# Altium PCB FM5006C.PcbDoc
Units mil, origin at the board's own origin, x right, y up, seen from the top; angles counter-clockwise.
Board outline 2170.03 x 1610.03 mil, 2 copper layers (Top Layer, Bottom Layer); 25 components, 15 nets, 79 pads, 78 vias.
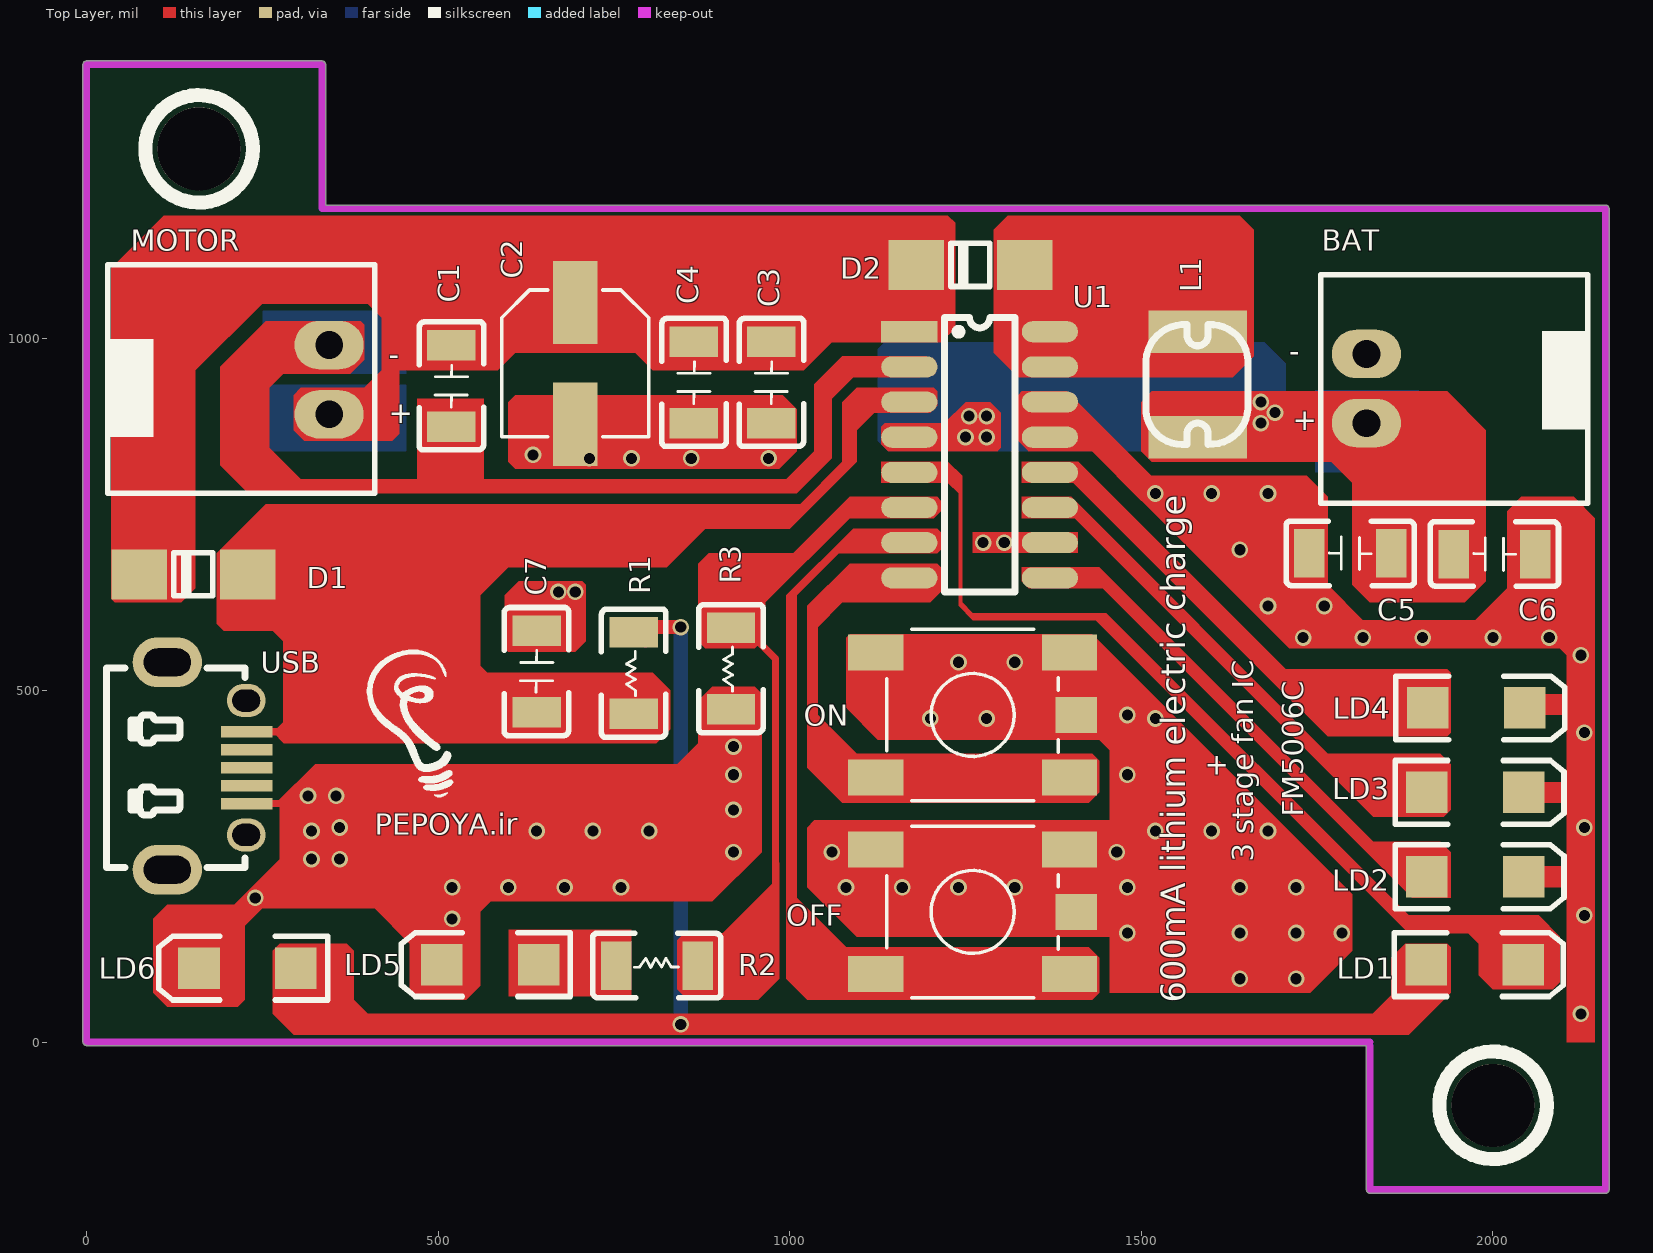
[diagram p0: Top Layer view]
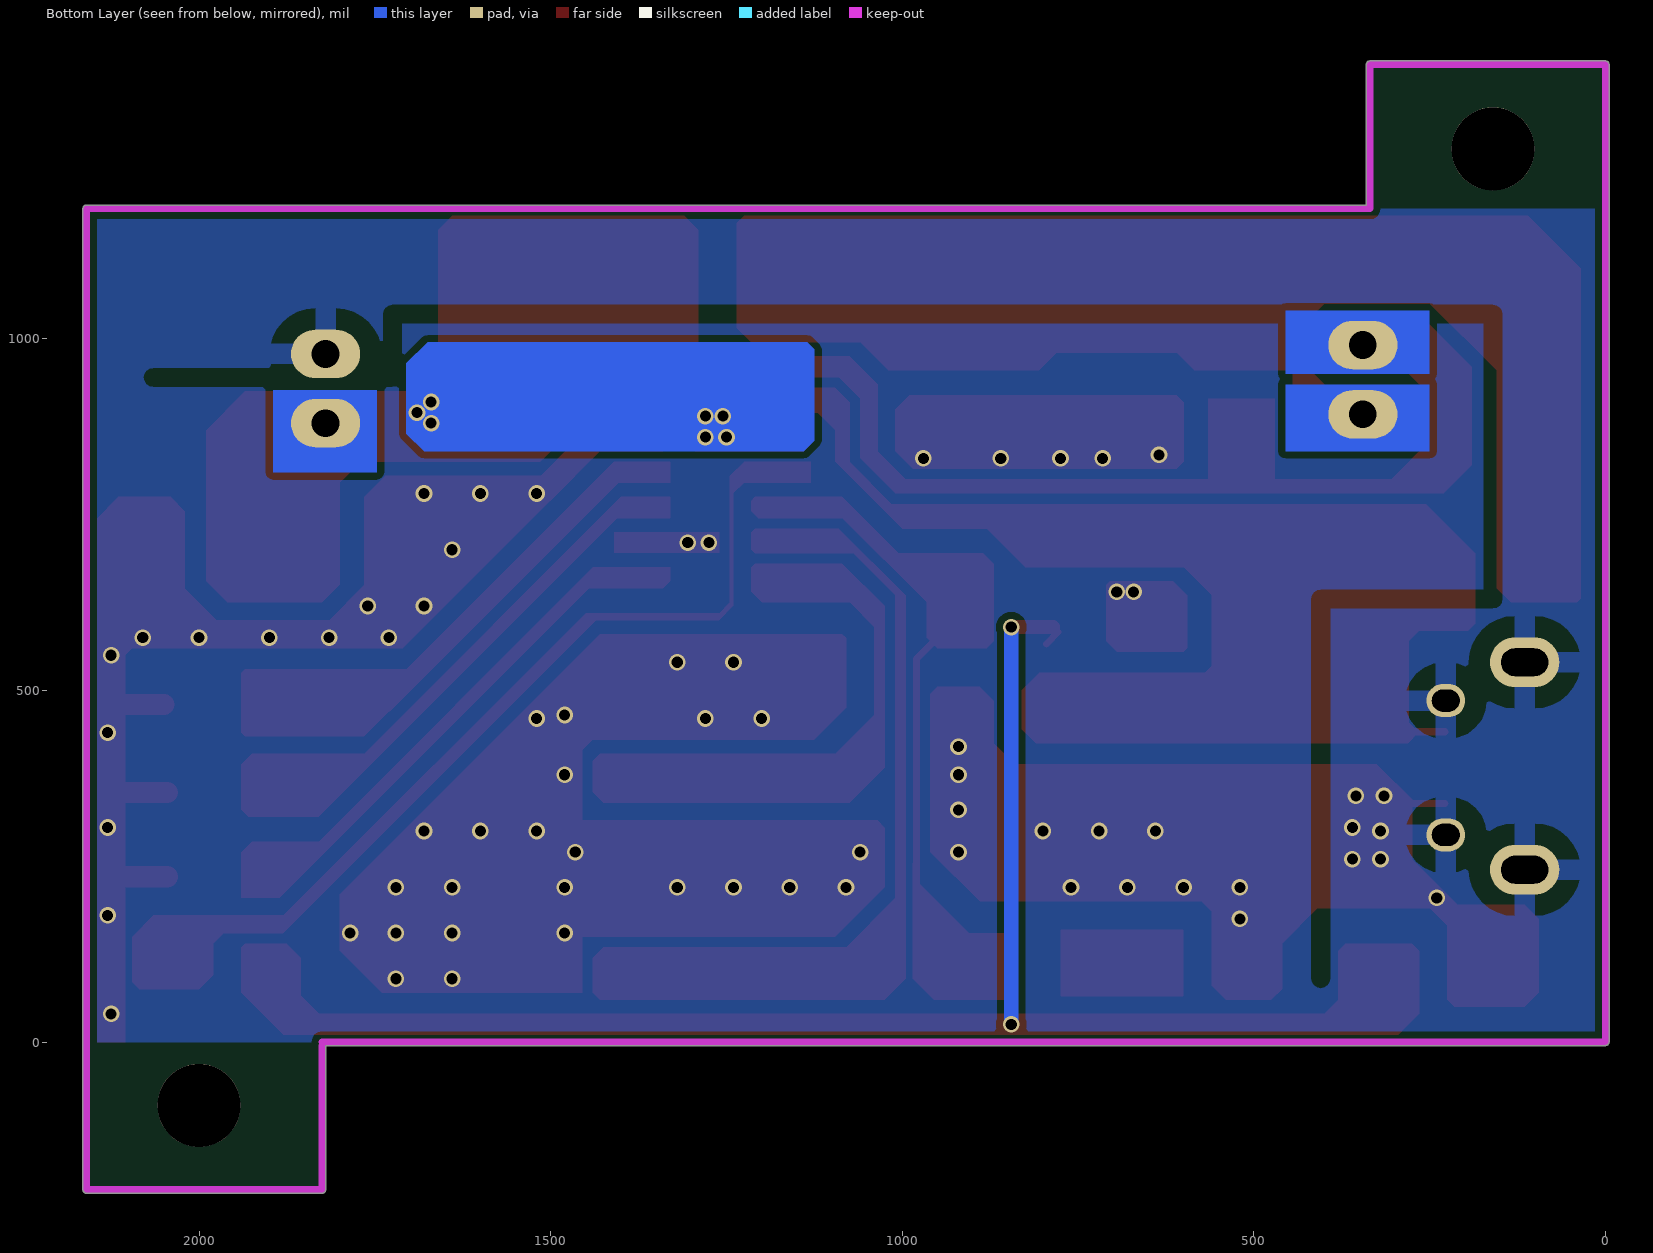
[diagram p1: Bottom Layer view, seen from below]
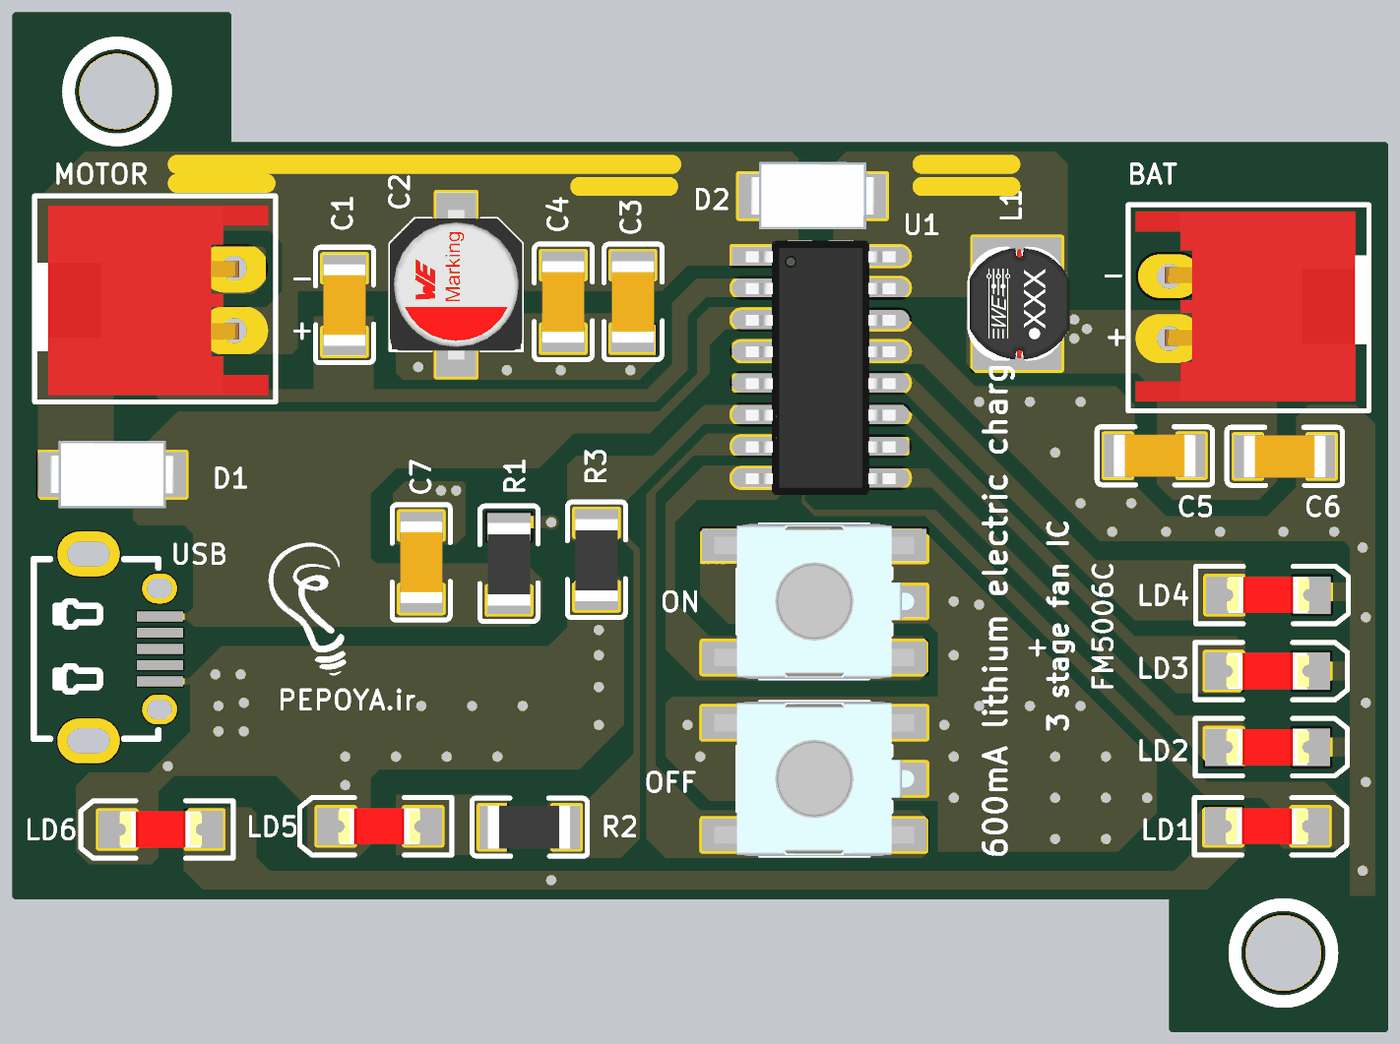
[diagram p2: 3D render of the assembled board from above, using the file's embedded part models]

## Layer stack, top to bottom
Top Solder: solder mask 0.4, Solder Resist, Dk 3.5
Top Layer: signal copper 1.4
Dielectric 1: dielectric 12.6, FR-4, Dk 4.8
Bottom Layer: signal copper 1.4
Bottom Solder: solder mask 0.4, Solder Resist, Dk 3.5

## Board outline
-5.01,0 -5.01,1390 cw(c0,1390) 0,1395.01 335,1395.01 cw(c335,1390) 340.01,1390 340.01,1190.01 2160,1190.01 cw(c2160,1185) 2165.02,1185 2165.01,0.03 2165.02,0 2165.02,-210 cw(c2160,-210) 2160,-215.01 1825,-215.02 cw(c1825,-210) 1819.98,-210 1819.98,-5.01 0,-5.01 cw(c0,0)

## Design rules (kind name [scope] priority, off if disabled: settings)
Clearance [All] p1: gap=10 ignorepadtopadclearanceinfootprint=FALSE
PlaneConnect [All] p1: pad.planeconnectstyle=Relief pad.reliefexpansion=20 pad.reliefentries=4 pad.reliefconductorwidth=20 pad.reliefairgap=20 via.planeconnectstyle=Direct via.reliefexpansion=20 via.reliefentries=4 via.reliefconductorwidth=10 via.reliefairgap=10
PolygonConnect [All] p1: thpad.connectstyle=Relief thpad.reliefconductorwidth=30 thpad.reliefentries=4 thpad.polygonreliefangle="90 Angle" thpad.airgapwidth=30 smdpad.connectstyle=Relief smdpad.reliefconductorwidth=10 smdpad.reliefentries=4 smdpad.polygonreliefangle="90 Angle" smdpad.airgapwidth=10 via.connectstyle=Direct via.reliefconductorwidth=10 via.reliefentries=4 via.polygonreliefangle="90 Angle" via.airgapwidth=10
RoutingVias [All] p1: holewidth=15.75 width=23.62 viastyle="Through Hole" minholewidth=15.75 minwidth=23.62 maxholewidth=15.75 maxwidth=23.62
SolderMaskExpansion [All] p1: expansion=4 istentingtop=FALSE
Width [All] p1: maxlimit=10 minlimit=10 preferedwidth=10
29 further rules are at their usual default settings.

## Components (designator, comment, footprint, x,y, rotation, side; value= is the part's Value field where it differs from the comment)
BAT "XH-2P" XHB-2AW 1815,926 r0 top
C1 "22UF" "Cap1206 - duplicate" 515,930 r270 top value=100nF
C2 "47UF/16V" "WCAP-AS5H 5x5.5x1.4" 695,965 r270 top value="3.3uF 400V"
C3 "22UF" "Cap1206 - duplicate" 970,935 r270 top value=100nF
C4 "22UF" "Cap1206 - duplicate" 860,935 r270 top value=100nF
C5 "1UF" "Cap1206 - duplicate" 1794.13,698.81 r180 top value=100nF
C6 "100NF" "Cap1206 - duplicate" 2005,690 r0 top value=100nF
C7 "1UF" "Cap1206 - duplicate" 643.81,529.72 r90 top value=100nF
D1 "SS14" "Diode 1N4007 SMD" 229.33,665 r180 top (schematic designator D)
D2 "SS14" "Diode 1N4007 SMD" 1334.33,1105 r180 top
L1 "3.3uH" "Inductor 4532" 1580,995 r90 top value="1mH 0.3A"
LD1 "LED_red" "LED 1206" 1973.9,110 r0 top value=RED
LD2 "LED1206" "LED 1206" 1975,235 r0 top
LD3 "LED1206" "LED 1206" 1975,355 r0 top
LD4 "LED1206" "LED 1206" 1976.1,475 r0 top
LD5 "LED1206" "LED 1206" 573.9,110 r180 top
LD6 "LED_green" "LED 1206" 228.9,105 r180 top value=GREEN
MOTOR "XH-2P" XHB-2AW 350,945 r180 top
OFF "SW-PUSH-CMS_BLUE" 431471031826 1260,185 r180 top value=SW_BLUE
ON "SW-PUSH-CMS_BLUE" 431471031826 1260,465 r180 top value=SW_BLUE
R1 "2K" RES1206 781.86,523.62 r90 top value=NS
R2 "30R" RES1206 810,105 r0 top value=NS
R3 "2K" RES1206 920,530 r90 top value=NS
U1 "FM5006C" SOP-16 1170,1010 r0 top
USB "Micro Input" "USB MICRO" 35,250 r0 top

## Footprints (in the part's own frame and the unit in brackets; to place one, negate y for a bottom-side part, rotate by r counter-clockwise, add the part's x,y. Pads: shape width x height; smd on the part's side, far side on the other; paste and mask are expansions set on the pad)
431471031826 [mm] "6*6mm vertical type, SMD, height 3.1mm, white actuator, 260gf, Grounded Terminal, T&R"
  rect 2x1.3 smd: 1(3.5,-2.25) 2(-3.5,-2.25) 3(3.5,2.25) 4(-3.5,2.25)
  rect 1.5x1.3 smd: 5(-3.75,0)
  silkscreen extent -3.1,-3.1 3.1,3.1, body extent -4,-3.1 4,3.1, height 3.09
"Cap1206 - duplicate" [mm]
  rect 1.1x1.75 smd: 1(-1.546,0.097) 2(1.404,0.097)
  silkscreen extent -2.39,-1.06 2.24,1.27, body extent -1.72,-0.75 1.58,0.95, height 0.94
"Diode 1N4007 SMD" [mm] "DO-214AC 1N4001-4007"
  rect 2x1.8 smd: 1(0,0) 2(3.92,0)
  silkscreen extent 1.27,-0.81 2.67,0.83, body extent -0.54,-1.36 4.46,1.34, height 2.16
"Inductor 4532" [mil]
  rect 60x140 smd: 1(15,0) 2(-135,0)
  silkscreen extent -145,-72 25,74, body extent -148,-82 28,75
"LED 1206" [mm]
  rect 1.5x1.5 smd: 1(-1.75,0) 2(1.75,0)
  silkscreen extent -2.9,-1.15 3.2,1.15, body extent -1.65,-0.72 1.65,0.73, height 1.36
RES1206 [mm] "Chip Resistor, 2-Leads, Body 3/20x1/60mm, IPC Medium Density DESIGNER:ABBAS BASEREH"
  rect 1.1x1.75 smd: 1(-1.446,0.09) 2(1.504,0.09)
  silkscreen extent -2.29,-1.07 2.34,1.26, body extent -1.65,-0.76 1.65,0.94, height 0.94
SOP-16 [mil]
  rect 80x30 smd: 1(0,0)
  oval 80x30 smd: 2(0,-50) 3(0,-100) 4(0,-150) 5(0,-200) 6(0,-250) 7(0,-300) 8(0,-350) 9(200,-350) 10(200,-300) 11(200,-250) 12(200,-200) 13(200,-150) 14(200,-100) 15(200,-50) 16(200,0)
  silkscreen extent 50,-370 150,20, body extent -18,-377 218,25, height 67
"USB MICRO" [mm]
  rect 1.854x0.4 smd paste+0 mask+0.051: 1(4.902,4.856) 2(4.902,4.206) 3(4.902,3.556) 4(4.902,2.906) 5(4.902,2.256)
  oval 2.5x1.8 hole 1 slot 1.7 at 0 deg paste-2539.97 mask+0.051: 6(2.032,-0.127) 6(2.032,7.366)
  oval 1.4x1.2 hole 0.8 slot 1 at 0 deg paste-2539.97 mask+0.051: 6(4.879,1.131) 6(4.879,5.981)
  silkscreen extent -0.17,-0.04 4.83,7.16, body extent -0.77,-0.77 5.13,7.88, height 2.8
"WCAP-AS5H 5x5.5x1.4" [mm] "Polarized capacitors, Aluminum Electrolytic Capacitors, 2-Leads, Body 5x5.5x1.4"
  rect 3x1.6 smd: 1(-2.2,0) 2(2.2,0)
  silkscreen extent -2.65,-2.65 2.65,2.65, body extent -3,-2.65 3,2.65
XHB-2AW [mm]
  oval 2.5x1.75 hole 1: 1(0.127,-1.168) 2(0.127,1.332)
  silkscreen extent -1.52,-4.06 8.13,4.19, body extent -1.23,-3.68 7.58,3.92, height 6.55

## Part data
BAT MOTOR: library part JST-2, "=Description"
C1 C3 C4 C5 C6 C7: library part C_1206, Manufacturer Part Number="1206 100nF", Package=1206, Automotive=Y, DrownBy=Xavi.Rocher, Revised=Oriol.Cos
C2: library part EKRG250ETD101MF09D, "3.3uF 400V", Manufacturer=Wurth, Manufacturer Part Number=860021373005, Package=CER6, Supplier Part Number 1=710-860021373005, Datasheet=https://www.mouser.es/datasheet/2/445/860021373005-1075178.pdf, DrownBy=Xavi.Rocher, Revised=Oriol.Cos, Supplier 1=Mouser
D1 D2: library part DIODE_1N4148, "High Conductance Fast Diode", Code_JEDEC=DO-204-AH, Company="SJ Libraries", ComponentLink1Description=Datasheet, ComponentLink1URL=http://www.fairchildsemi.com/, ComponentLink2Description=Reference, ComponentLink2URL=http://www.fairchildsemi.com/ds/1N%2F1N4148.pdf, Designer="Eng. Saeid Jorablo", HelpURL=http://s3.picofile.com/file/7443264187/Coming_Soon_logo.gif, LatestRevisionDate=17-Jul-2002, LatestRevisionNote="Re-released for DXP Platform.", Mounting Technology="Surface Mount\Through-Hole", PackageDescription="Diode, Axial; Body 3.8 x 1.9 mm (LxDia. max), Lead Dia. 0.53 mm (max)", PackageReference=DO-35, Published=8-Jun-2000, Publisher="SJ Unlimited", Status=Unreleased
L1: library part DR0608-105L, "1mH 0.43A DR0608", Manufacturer=BOURNS, Manufacturer Part Number=4532, Package=DR0608, Supplier Part Number 1=1929764, Datasheet=http://www.farnell.com/datasheets/2360349.pdf?_ga=2.137143415.674541929.1556003454-804436753.1549448632, DrownBy=Xavi.Rocher, Revised=Oriol.Cos, Supplier 1=Farnell
LD1: library part MCD-02899, "LED, Red, VF : Min=1.75V , Max=2.35V, 25mA, 0603", Manufacturer=EVERLIGHT, Manufacturer_Part_Number=19-213/R6C-AP1Q2B/5T, Package=0603, Component_Country_Of_Origin=China, ComponentLink1URL=http://tunmcdsvn.tun.st.com/Component_Documentation_Library/Trunk/Display/EVERLIGHT_19-213-R6C-AP1Q2B-5T, Full_Alternate_Internal_Part_Number=MCD-00049, ID=5015, Internal_Part_Number=MCD-02899, Order_Code_Digikey=1080-19-213/R6C-AP1Q2B/5TTR-ND, Order_Code_Farnell=N/A, Order_Code_RS=N/A, Part_Preference=Recommended, Part_Type=Display, ShowFields=YES, Status=Checked
LD2 LD3 LD4 LD5: library part "LED 5MM", "Light Emitting Diode", Data=16-12-2016, Designer="Abbas Basereh"
LD6: library part MCD-02900, "LED, Green, 2V, 25mA, 0603, SMD", Manufacturer=EVERLIGHT, Manufacturer_Part_Number=19-213SYGC/S530-E2/5T, Package=0603, Component_Country_Of_Origin=China, ComponentLink1URL=http://tunmcdsvn.tun.st.com/Component_Documentation_Library/Trunk/Display/EVERLIGHT_19-213SYGC-S530-E2-5T, Full_Alternate_Internal_Part_Number=MCD-00320, ID=5016, Internal_Part_Number=MCD-02900, Order_Code_Digikey=1080-19-213SYGC/S530-E2/5TTR-ND, Order_Code_Farnell=N/A, Order_Code_RS=N/A, Part_Preference=Recommended, Part_Type=Display, Partial_Alternate_Internal_Part_Number=MCD-00050, ShowFields=YES, Status=Checked
OFF ON: library part MCD-00002, "Non-Open Push-Button 0.1A 24V BLUE", Manufacturer=WEALTHMETAL, ComponentLink1Description=Datasheet, ComponentLink1URL=http://tunmcdsvn.tun.st.com/Component_Datasheet_Library/Trunk/Misc/Wealthmetal_Tact-Switch_TD0341, Initial_Board_Reference=MB1274, Internal_Part_Number=MCD-00002, Order_Code_Farnell=535-930, Part_Type=Misc, Provided_By=Subcon, Status=Released
R1 R2 R3: library part R_1206, Package=1206, Automotive=Y, DrownBy=Xavi.Rocher, Revised=Oriol.Cos
U1: "SO-16"
USB: JLCPCB Part Class="Extended Part", Manufacturer="XKB Enterprise", Manufacturer Part=U254-051T-4BH23-S2B, Contributor=LCSC, spicePre=U, spiceSymbolName=U254-051T-4BH23-S2B, Supplier=LCSC, Supplier Part=C319164

## Free pads (board coordinates)
  round 118.11 hole 118.11: 8(160,1270) 8(2000,-90)

## Via types
v1: diameter 23.62, hole 15.75, Top Layer to Bottom Layer, tented both sides, 76 vias
v2: diameter 23.62, hole 15.75, Top Layer to Bottom Layer, 2 vias

## Nets (pads, with @x,y where several pads share a name; then routed paths per layer and width w, separated by ;. In a path a pad name is that pad's centre, name@x,y a point inside that pad or via, vN(x,y) a via of type N, cw(c..) or ccw(c..) an arc to the next point about the centre after c; other vN are vias at no path point)
5.0V: C7.1 D1.1 R1.1 U1.3 USB.1 | length 1571.3
  Top Layer w10: USB.1 301.18,441.18 310,450 310,655 300,665 D1.1@233.27,665 ; D1.1 D1.1@233.27,665 ; 530,470 531.14,468.86 C7.1 642.19,466.67 R1.1 ; 995,740 308.27,740 D1.1@233.27,665 ; 1085,830 1085,890 1105,910 U1.3
BAT: BAT.1 C5.1 C6.1 L1.2 U1.4 | length 934.4
  Top Layer w10: U1.4 v1(1250,860) ; L1.2 1600,880 v1(1670,880) ; v1(1670,910) 1675,905 v1@1675,903.9 ; C5.1 1855,825 1865.86,835.86 1874.14,835.86 1944.13,765.87 C6.1
  Bottom Layer w10: v1(1250,860) 1620,860 ; v1(1670,880) 1670,900 v1@1675,905 ; v1(1670,910) v1@1675,905 ; v1(1690,895) 1686.31,895 1676.31,905 v1@1675,905
  other v1: 1280,860 1255,890 1280,890
GND: BAT.2 C2.2 C3.2 C4.2 C5.2 C6.2 C7.2 LD2.2 LD3.2 LD4.2 LD5.2 LD6.2 OFF.1 OFF.2 ON.1 ON.2 R3.1 U1.10 U1.13 U1.14 USB.5 USB.6 | length 2468.1
  Top Layer w10: LD6.2@135.47,129.53 LD6.2 ; USB.5 898.82,338.82 920,360 v1(920,380) v1(920,420) 920,466.59 915,471.59 R3.1 ; LD5.2 505,156.31 520,171.31 v1(520,175) ; C7.2 652.8,585 697.8,630 v1@700,630 ; v1(860,830) 860,875.91 C4.2 C3.2 C3.2@975,878.54 ; v1(970,830) 970,833.69 v1@975,838.69 ; v1(1060,270) 1118.62,270 OFF.1 ; ON.1@1118.62,550 ON.1 1320,553.58 ON.2 ; OFF.1@1129.44,265 OFF.2@1405.03,265 ; v2(1275,710) v2(1305,710) U1.10 ; U1.13 1430,860 1500,790 1625,790 ; OFF.2 1401.38,270 v1(1465,270) ; 2040,585 2045,580 ; LD2.2 LD2.2@2045,236.1 ; LD4.2 LD4.2@2050,480
  Top Layer w30: LD2.2@2045,235 2115,235 ; LD3.2@2045,355 2115,355 ; LD4.2@2050,480 2120,480
  other v1: 2125,40 1640,90 1720,90 1480,155 1640,155 1720,155 1785,155 2130,180 240,205 520,220 600,220 680,220 760,220 1080,220 1160,220 1240,220 1320,220 1480,220 1640,220 1720,220 320,260 360,260 920,270 320,300 640,300 720,300 800,300 1520,300 1600,300 1680,300 360,305 2130,305 920,330 315,350 355,350 1480,380 2130,440 1200,460 1280,460 1520,460 1480,465 1240,540 1320,540 2125,550 1730,575 1815,575 1900,575 2000,575 2080,575 1680,620 1760,620 671.1,640 695,640 1640,700 1520,780 1600,780 1680,780 715,830 775,830 635,835
NetC1_1: C1.1 C2.1 C3.1 C4.1 D1.2 D2.2 MOTOR.2 U1.1 | length 1818.5
  Top Layer w10: D1.2 75,1055 120,1100 510,1100 525,1085 525,1065 ; 445,980 455.87,990.87 C1.1 525,997.06 525,1065 ; D2.2 1180,1020 U1.1 877.94,1010 C4.1 851.02,995.87 811.88,1035 711.61,1035 C2.1 681.61,1065 525,1065
NetC1_2: C1.2 MOTOR.1 U1.2 | length 1276.9
  Top Layer w10: MOTOR.1 266,991 220,945 220,815 240,795 515,795 ; C1.2 518.81,798.81 515,795 ; 1015,795 518.81,795 515,795 ; 1060,940 1080,960 U1.2
NetD2_1: D2.1 L1.1 U1.15 U1.16 | length 317.1
  Top Layer w10: D2.1 1338.27,1105 1370,1073.27 U1.16 ; U1.15 U1.16 ; L1.1@1525,1010 U1.16
NetLD1_1: LD1.1 LD6.1 R1.2 | length 2364.7
  Top Layer w10: LD6.1 297.8,52.2 325,25 1820,25 LD1.1 ; R1.2@785.51,590 R1.2 R1.2@794.98,566.16
  Top Layer w20: R1.2@785.51,590 v1(845,590)
  Bottom Layer w20: v1(845,25) v1(845,590)
NetLD1_2: LD1.2 U1.5 | length 223.2
  Top Layer w10: 1875,170 2035,170 2042.8,162.2 LD1.2
NetLD2_1: LD2.1 U1.9 | length 128.9
  Top Layer w10: U1.9 1445,660 ; 1857.43,247.57 1893.53,247.57 LD2.1
NetLD3_1: LD3.1 U1.11 | length 136.4
  Top Layer w10: U1.11 1373.71,756.29 U1.11@1403.71,756.29 ; 1805,355 LD3.1
NetLD4_1: LD4.1 U1.12 | length 676
  Top Layer w10: U1.12 1395,810 1730,475 LD4.1
NetLD5_1: LD5.1 R2.1 | length 5
  Top Layer w10: R2.1@749.52,105 R2.1
NetOFF_3: OFF.3 OFF.4 U1.7 | length 429.4
  Top Layer w10: 1000,115 1020,95 OFF.4@1421.1,95
NetON_3: ON.3 ON.4 U1.8 | length 742.4
  Top Layer w10: U1.8 1080,660 1030,610 1030,410 1063.58,376.42 ON.3 ON.4
NetR2_2: R2.2 R3.2 U1.6 | length 895
  Top Layer w10: R2.2@869.2,113.54 948.54,113.54 980,145 980,545 950.12,574.88 950.12,630.12 1080,760 U1.6
pads on no net: OFF.5 ON.5 USB.2 USB.3 USB.4

## Polygon pours and split planes (outlines as drawn)
GND on Bottom Layer "GND_L02_P000" (solid, remove dead copper, pour order 0): 2170,1180 2170,0 0,0 5,5 5,1185 2165,1185

## Keep-outs
Keep-Out Layer:
  lines w10: 0,1180 0,1390 335,1390 335,1185 2160,1185 2160,0 2160,-210 1825,-210 1825,-5 ; 0,1185 0,1110 0,0 1825,0

## Other copper
Top Layer:
  rectangle net GND: 1260,695 1410,725
  rectangle net NetLD5_1: 600,65 775,160
  rectangle net NetC1_2: 470,790 565,915
  region net NetLD1_1: 1940,70 1880,10 295,10 265,40 265,130 275,140 370,140 380,130 380,60 400,40 1835,40 1855,60 1855,120 1875,140 1935,140 1940,135
  region net NetR2_2: 840,75 855,60 955,60 985,90 985,255 980,260 980,230 905,155 850,155 840,145
  region net GND: 2095,560 2105,550 2105,0 2145,0 2145,745 2115,775
  region net GND: 710,650 710,570 695,555 600,555 595,560 595,635 615,655 705,655
  region net GND: 1430,580 1800,210 1800,130 1740,70 1455,70 1455,415 1430,440
  region net 5.0V: 560,635 560,535 570,525 805,525 830,500 830,445 810,425 515,425
  region net GND: 270,340 325,395 840,395 870,425 870,485 890,505 950,505 960,495 960,270 890,200 575,200 560,185 560,80 540,60 475,60 460,75 460,140 410,190 250,190 225,165 225,60 215,50 115,50 95,70 95,175 115,195 210,195 275,260 275,335
  region net 5.0V: 325,425 515,425 560,470 560,635 600,675 825,675 885,735 380,735 365,750 320,705 320,700
  region net GND: 1025,220 1095,150 1455,150 1485,180 1485,300 1470,315 1035,315 1025,305
  region net GND: 1080,475 1125,430 1440,430 1460,450 1460,550 1430,580 1085,580 1080,575
  region net NetON_3: 1215,640 1200,625 1075,625 1040,590 1040,465 1095,410 1430,410 1440,400 1440,355 1425,340 1075,340 1025,390 1025,620 1085,680 1210,680 1215,675
  region net NetOFF_3: 1215,700 1210,695 1070,695 1010,635 1010,205 1080,135 1425,135 1440,120 1440,70 1430,60 1025,60 995,90 995,635 1090,730 1210,730 1215,725
  region net NetR2_2: 1215,770 1215,755 1205,745 1085,745 965,625 965,575 950,560 880,560 870,570 870,680 885,695 1005,695 1085,775 1210,775
  region net NetLD4_1: 1940,440 1935,435 1765,435 1405,795 1330,795 1330,825 1410,825 1705,530 1935,530 1940,525
  region net NetLD1_2: 1130,825 1225,825 1245,805 1245,625 1260,610 1450,610 1880,180 2065,180 2095,150 2095,85 2085,75 2000,75 1980,95 1980,140 1965,155 1880,155 1435,600 1260,600 1240,620 1240,780 1225,795 1130,795
  region net NetLD2_1: 1330,675 1440,675 1830,285 1925,285 1940,270 1940,205 1885,205 1445,645 1340,645 1330,655
  region net NetLD3_1: 1330,775 1400,775 1765,410 1925,410 1940,395 1940,330 1930,320 1830,320 1405,745 1330,745
  region net GND: 1765,650 1815,600 1975,600 2020,645 2020,755 2040,775 2115,775 2125,765 2125,590 2095,560 1710,560 1490,780 1490,805 1735,805 1765,775
  region net BAT: 1875,925 1935,925 1990,870 1990,655 1960,625 1825,625 1800,650 1800,795 1760,835
  region net BAT: 1695,925 1875,925 1895,905 1895,855 1865,825 1700,825
  region net BAT: 1500,840 1515,825 1700,825 1710,835 1710,920 1705,925 1515,925 1500,910
  region net GND: 1325,855 1340,840 1430,840 1500,770 1690,770 1690,805 1513.79,805 1393.79,925 1330,925 1325,920
  region net BAT: 1130,850 1140,840 1295,840 1300,845 1300,895 1285,910 1250,910 1220,880 1135,880 1130,875
  region net NetD2_1: 1290,980 1325,945 1630,945 1660,975 1660,1155 1640,1175 1310,1175 1290,1155
  region net 5.0V: 1210,905 1200,895 1120,895 1095,870 1095,825 1000,730 385,730 355,700 355,455 325,425 280.77,425 265.39,440.39 280,455 280,570 265,585 195,585 185,595 185,695 255,765 1015,765 1075,825 1075,910 1095,930 1205,930 1210,925
  region net GND: 600,825 610,815 985,815 1010,840 1010,900 990,920 610,920 600,910
  region net NetC1_2: 395,970 375,950 280,950 260,930 260,845 305,800 995,800 1035,840 1035,935 1075,975 1195,975 1195,955 1185,945 1090,945 1060,915 1060,830 1010,780 230,780 190,820 190,960 255,1025 390,1025 395,1020
  region net NetC1_1: 420,955 420,1030 400,1050 250,1050 155,955 155,645 135,625 40,625 35,630 35,1100 110,1175 510,1175
  region net NetC1_1: 1235,1165 1235,1015 1215,995 1060,995 1020,955 805,955 780,980 610,980 585,955 445,955 445,865 435,855 310,855 295,870 295,920 305,930 395,930 420,955 420,1085 510,1175 1225,1175
Bottom Layer:
  rectangle net NetC1_1: 250,840 455,935
  rectangle net NetC1_2: 250,950 455,1040
  rectangle net BAT: 1747.08,810 1895,927.2
  region net BAT: 1125,855 1140,840 1680,840 1705,865 1705,965 1675,995 1135,995 1125,985

## Silkscreen, mask and mechanical layers (free items; w line width, h text height)
Top Overlay:
  drawing of 7 lines, arcs and shapes, not listed
  text "-" at 1710,967.15 h30
  text "-" at 430,962.15 h30
  text "+" at 430,880 h30
  text "+" at 1715,870 h30
  text "+" at 1590,380 h30
  text "FM5006C" at 1730,320 h30 r90
  text "PEPOYA.ir" at 410,295 h30
  text "3 stage fan IC" at 1659,256 h30 r90
  text "600mA lithium electric charge" at 1562.34,56 h35 r90
Top Solder:
  lines w30: 255,1125 395,1125 ; 255,1155 1035,1155 ; 890,1120 1030,1120 ; 1430,1120 1570,1120 ; 1430,1155 1570,1155
Bottom Solder:
  lines w30: -138,1326 -138,1328